# EAGLE board V0.99.3-ESP32-3-fusion (EAGLE 9.6.2)
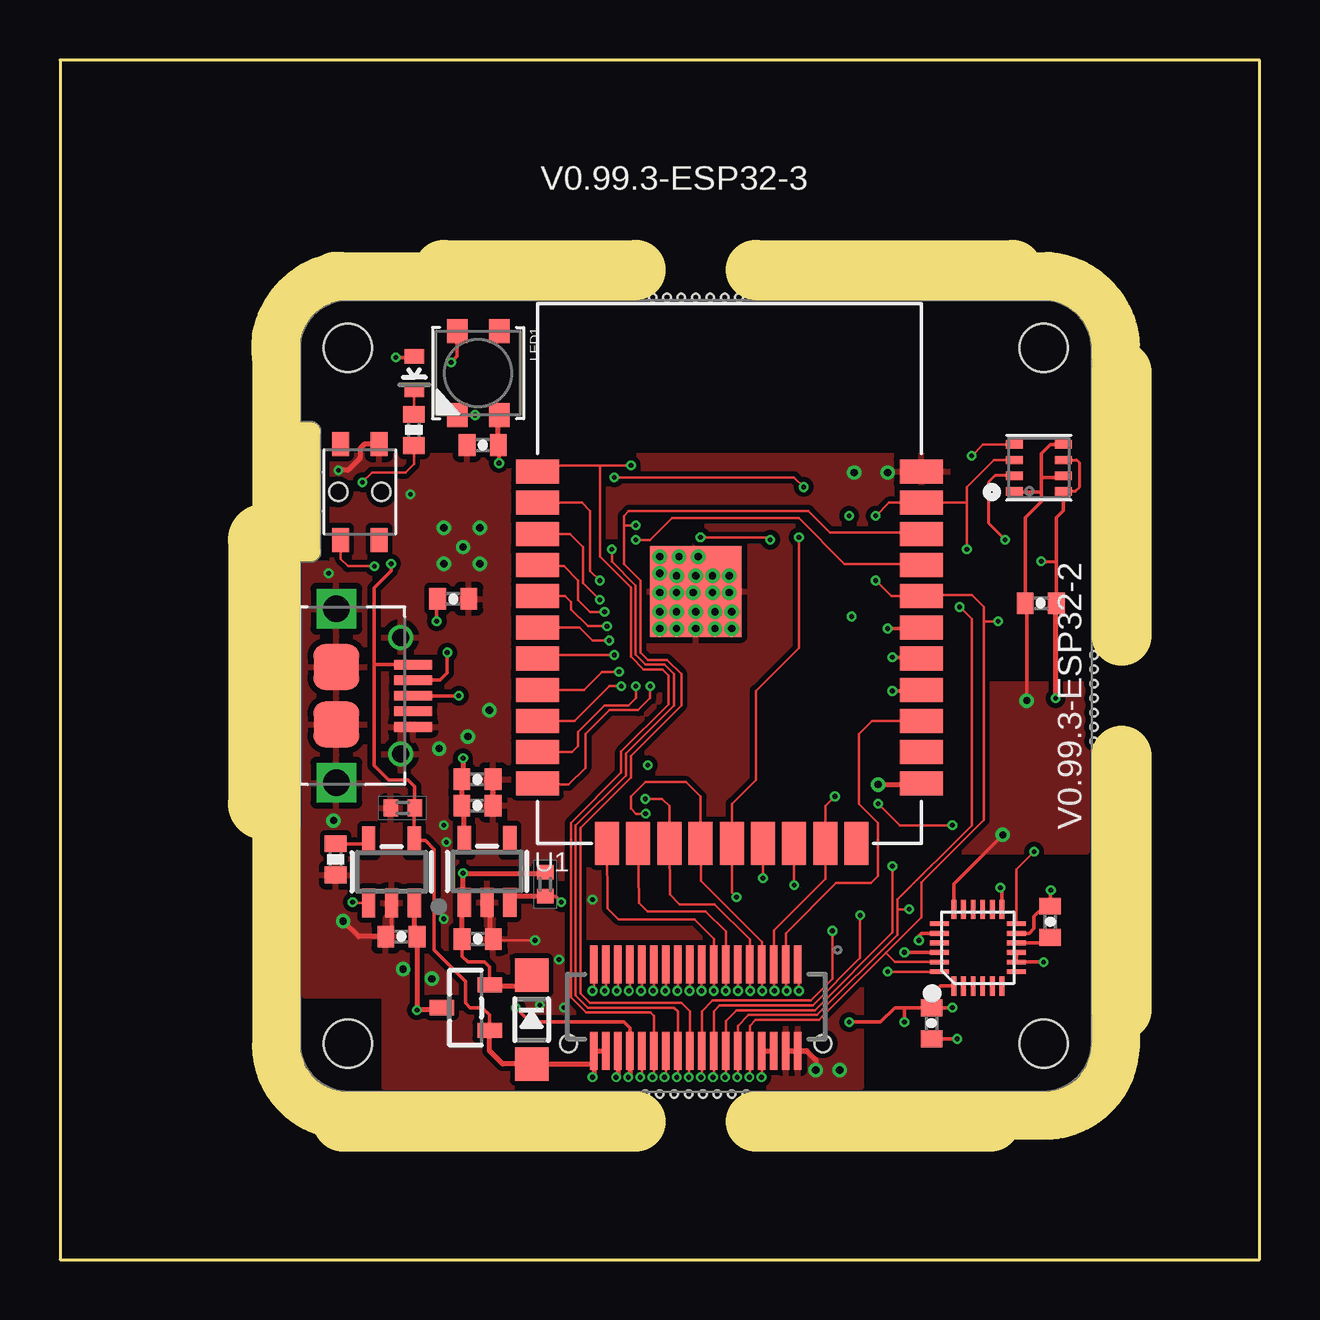
[diagram p0: board, top side]
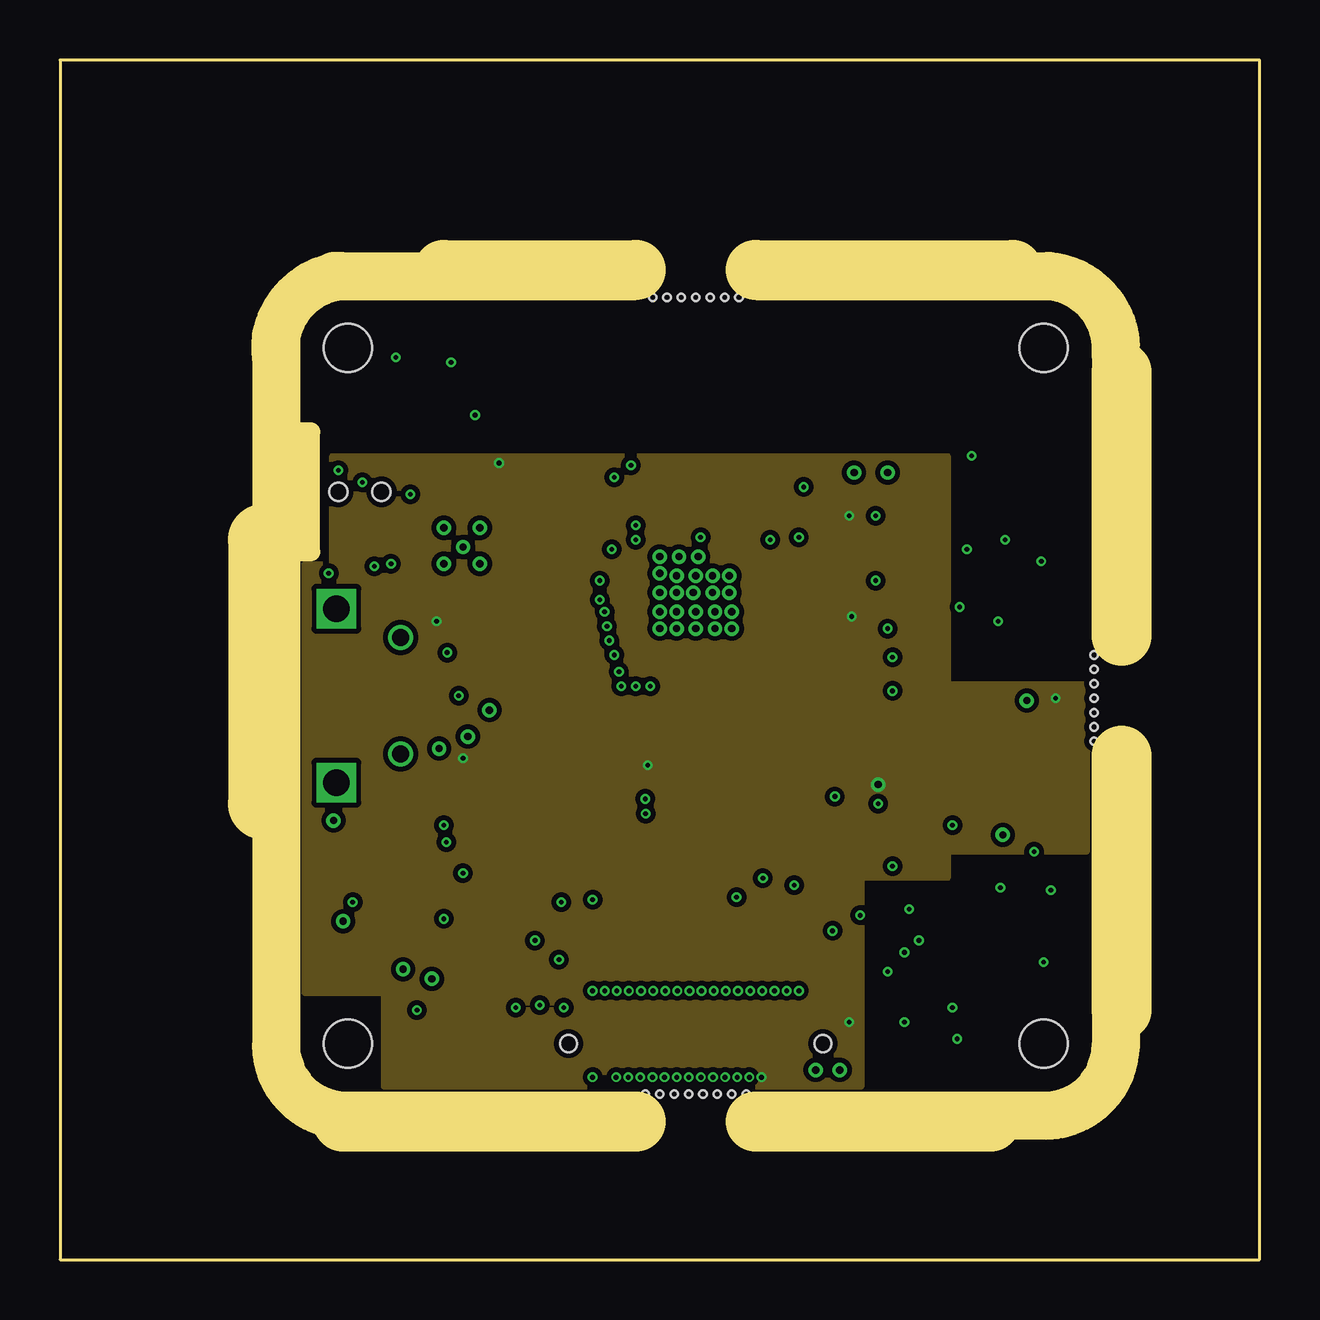
[diagram p1: board, inner layer VCC]
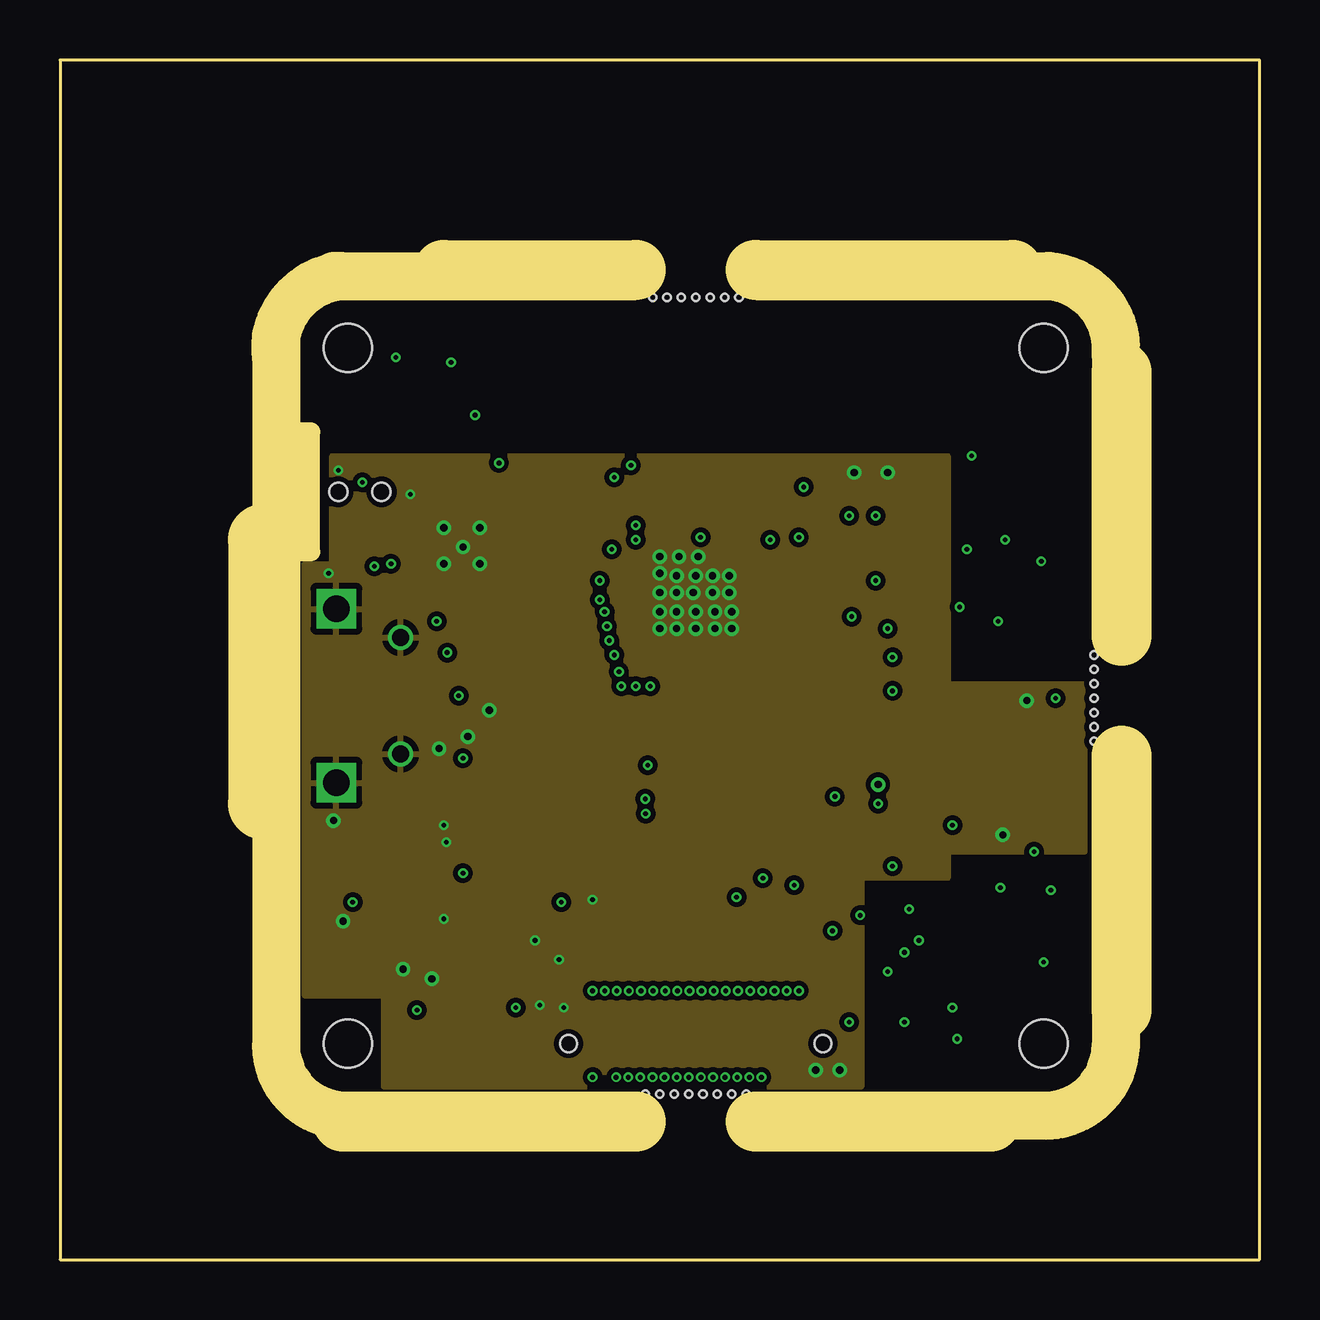
[diagram p2: board, inner layer GND]
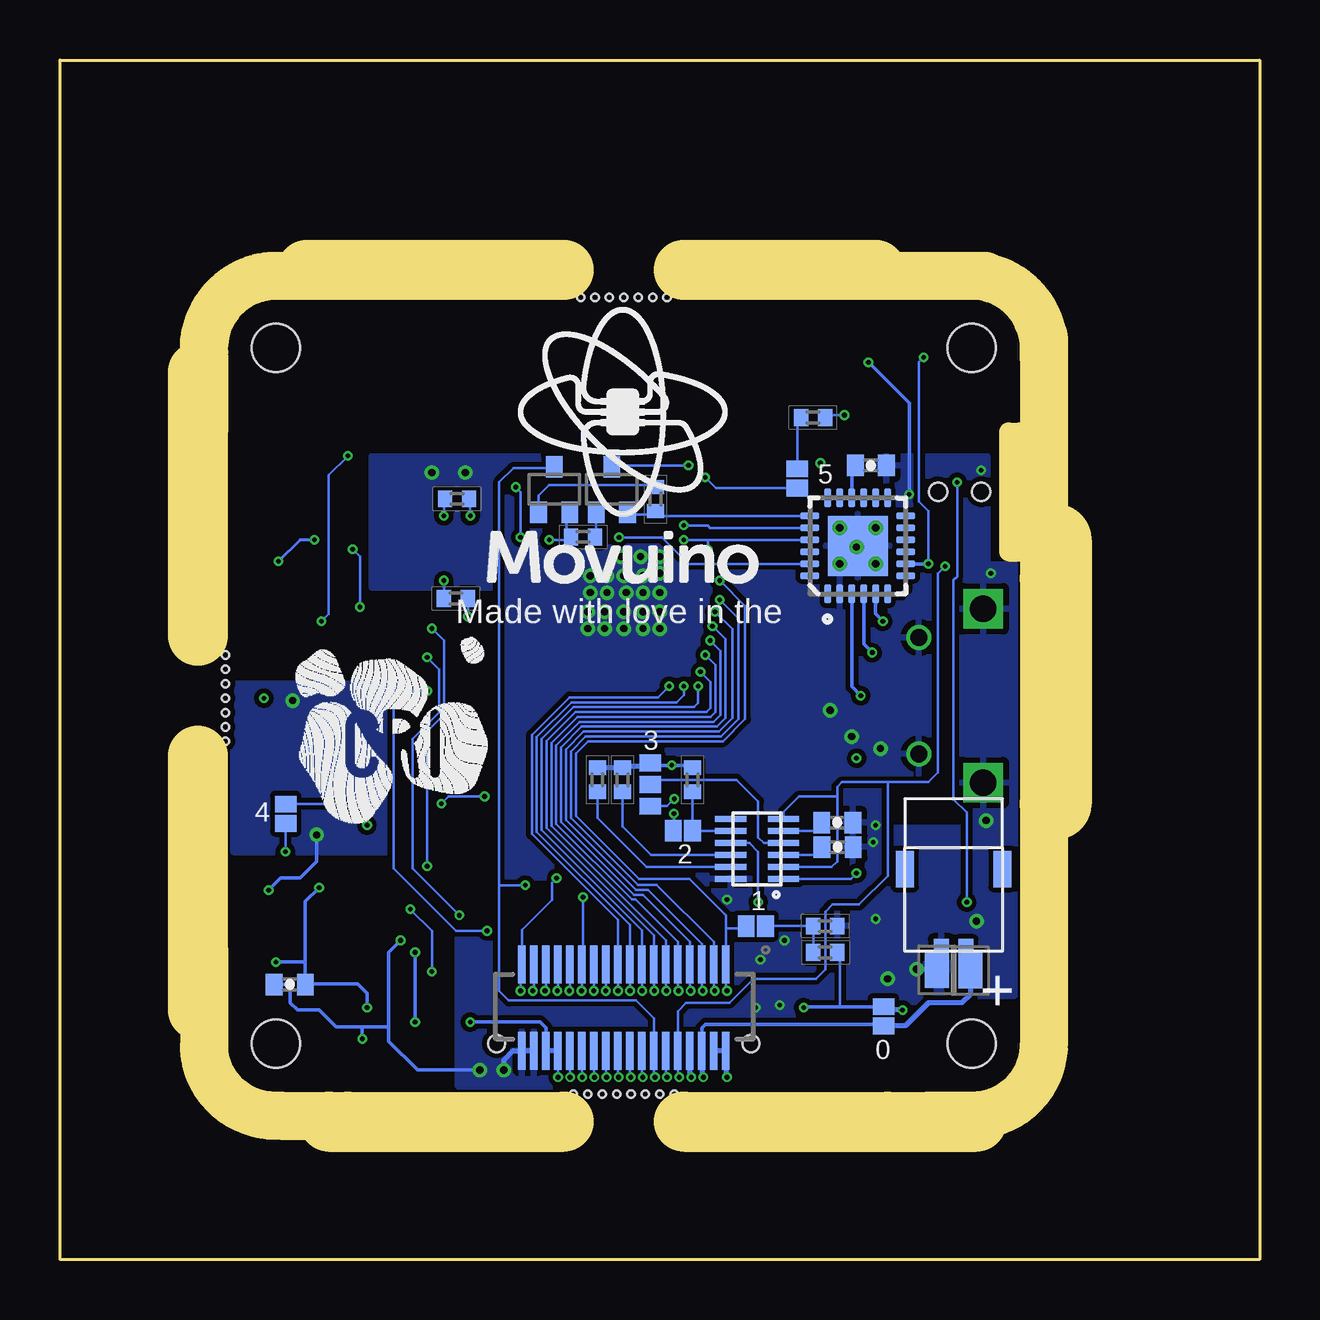
[diagram p3: board, bottom side, seen from below]

Size 50 x 50 mm. Coordinates in mm from the lower left corner, seen from the top.
Outline: 0,50 0,0 50,0 50,50 0,50
Copper layers (1*2*15*16): Top 0.035mm / dielectric 0.2mm / VCC 0.0175mm / dielectric 0.3mm / GND 0.0175mm / dielectric 0.2mm / Bottom 0.035mm
Design rules "PCBWAY_4layer_DRU_no_angle_smallest": minimum track width 4mil, minimum drill 0.2mm, track to track 4mil, track to pad 4mil, pad to pad 4mil, via to via 4mil, smd to smd 0mil, copper to edge 10mil, drill to drill 8mil, minimum pad ring 6mil, minimum via ring 4mil, stop-mask expansion 4mil, vias tented up to drill 25mil, thermal gap 10mil
Net classes: 1 pcbway_smallest: width 0.102 mm, drill 0.2 mm, clearance 0.102 mm
Holes 2 mm at 41,38 12,9 12,38 41,9
Holes 0.3 mm at 28.3,40.1 25.9,40.1 27.1,40.1 27.7,40.1 26.5,40.1 43.1,24.6 43.1,23.4 43.1,25.2 43.1,22.8 43.1,24 26.2,6.9 27.4,6.9 28.6,6.9 28,6.9 26.8,6.9 25.3,40.1 24.7,40.1 43.1,22.2 43.1,21.6 25.6,6.9 25,6.9 24.4,6.9
Milling: 24 lines

## Footprints (pad centres in the part's own frame; a part is rotated, then mirrored left to right if it is on the bottom)
0402-CAP = smd 0.7 x 0.9: 1 -0.65,0; 2 0.65,0
SOD-123 = smd 1.4 x 1.4: A 1.85,0; C -1.85,0
DF12-36-DP-NL = smd 0.3 x 1.6: 1 -4.25,-1.8; 2 -4.25,1.8; 3 -3.75,-1.8; 4 -3.75,1.8; 5 -3.25,-1.8; 6 -3.25,1.8; 7 -2.75,-1.8; 8 -2.75,1.8; 9 -2.25,-1.8; 10 -2.25,1.8; 11 -1.75,-1.8; 12 -1.75,1.8; 13 -1.25,-1.8; 14 -1.25,1.8; 15 -0.75,-1.8; 16 -0.75,1.8; 17 -0.25,-1.8; 18 -0.25,1.8; 19 0.25,-1.8; 20 0.25,1.8; 21 0.75,-1.8; 22 0.75,1.8; 23 1.25,-1.8; 24 1.25,1.8; 25 1.75,-1.8; 26 1.75,1.8; 27 2.25,-1.8; 28 2.25,1.8; 29 2.75,-1.8; 30 2.75,1.8; 31 3.25,-1.8; 32 3.25,1.8; 33 3.75,-1.8; 34 3.75,1.8; 35 4.25,-1.8; 36 4.25,1.8 | hole 0.7: -5.3,1.5; 5.3,1.5
0402-JUMPER3-1-2-CLOSED = smd 0.7 x 0.9: 1 -0.9,0; 2 0,0; 3 0.9,0
LED3535-2 = smd 1 x 0.85: 1 -1.75,0.875; 2 -1.75,-0.875; 3 1.75,-0.875; 4 1.75,0.875
LED-0603-LCSC90692 = smd 0.8 x 0.6: A 0,-0.7; C 0,0.7
PWR2P_1.0 = smd 2.032 x 0.635: + 0.508,0.508; - 0.508,-0.508 | smd 1.524 x 0.762: P$3 -3.429,2.032; P$4 -3.429,-2.032
SOT-323 = smd 0.7 x 0.9: 1 -0.65,-0.95; 2 0.65,-0.95; 3 0,0.95
SOT23-R = smd 0.635 x 1.016: 1 -0.95,-1; 2 0.95,-1; 3 0,1
R0402-SMALL-TDOCU = smd 0.6 x 0.7: 1 -0.5,0; 2 0.5,0
0402-RES = smd 0.7 x 0.9: 1 -0.65,0; 2 0.65,0
LCSC145875-3.5*3 = smd 1 x 0.7: 1 2,0.8; 2 2,-0.8; 3 -2,0.8; 4 -2,-0.8 | hole 0.75: 0,0.9; 0,-0.9
PAD-1X1.5_NOSILK = smd 1 x 1.5: P$1 0,0
SOT23-5 = smd 0.55 x 1.2: 1 -0.95,-1.3; 2 0,-1.3; 3 0.95,-1.3; 4 0.95,1.3; 5 -0.95,1.3
QFN24_4MM_SMSC = smd 0.8 x 0.28: 1 -2,1.25; 2 -2,0.75; 3 -2,0.25; 4 -2,-0.25; 5 -2,-0.75; 6 -2,-1.25; 13 2,-1.25; 14 2,-0.75; 15 2,-0.25; 16 2,0.25; 17 2,0.75; 18 2,1.25 | smd 0.28 x 0.8: 7 -1.25,-2; 8 -0.75,-2; 9 -0.25,-2; 10 0.25,-2; 11 0.75,-2; 12 1.25,-2; 19 1.25,2; 20 0.75,2; 21 0.25,2; 22 -0.25,2; 23 -0.75,2; 24 -1.25,2 | smd 2.5 x 2.5: THERM 0,0
TDFN12 = smd 0.25 x 1.3: 1 -1.25,-1.1; 2 -0.75,-1.1; 3 -0.25,-1.1; 4 0.25,-1.1; 5 0.75,-1.1; 6 1.25,-1.1; 7 1.25,1.1; 8 0.75,1.1; 9 0.25,1.1; 10 -0.25,1.1; 11 -0.75,1.1; 12 -1.25,1.1
WT32 = smd 3.8 x 3.8: 0 -1.4,-0.75 | smd 1.8 x 1: 1 -8,4.25; 2 -8,2.95; 3 -8,1.65; 4 -8,0.35; 5 -8,-0.95; 6 -8,-2.25; 7 -8,-3.55; 8 -8,-4.85; 9 -8,-6.15; 10 -8,-7.45; 11 -8,-8.75; 21 8,-8.75; 22 8,-7.45; 23 8,-6.15; 24 8,-4.85; 25 8,-3.55; 26 8,-2.25; 27 8,-0.95; 28 8,0.35; 29 8,1.65; 30 8,2.95; 31 8,4.25 | smd 1 x 1.8: 12 -5.1,-11.25; 13 -3.8,-11.25; 14 -2.5,-11.25; 15 -1.2,-11.25; 16 0.1,-11.25; 17 1.4,-11.25; 18 2.7,-11.25; 19 4,-11.25; 20 5.3,-11.25
LEAD-QFN24-MPU9250 = smd 0.8 x 0.2: 1 -1.6,1; 2 -1.6,0.6; 3 -1.6,0.2; 4 -1.6,-0.2; 5 -1.6,-0.6; 6 -1.6,-1; 13 1.6,-1; 14 1.6,-0.6; 15 1.6,-0.2; 16 1.6,0.2; 17 1.6,0.6; 18 1.6,1 | smd 0.2 x 0.8: 7 -1,-1.6; 8 -0.6,-1.6; 9 -0.2,-1.6; 10 0.2,-1.6; 11 0.6,-1.6; 12 1,-1.6; 19 1,1.6; 20 0.6,1.6; 21 0.2,1.6; 22 -0.2,1.6; 23 -0.6,1.6; 24 -1,1.6
BME280 = smd 0.7 x 0.35: 1 1.025,0.975; 2 1.025,0.325; 3 1.025,-0.325; 4 1.025,-0.975; 5 -1.025,-0.975; 6 -1.025,-0.325; 7 -1.025,0.325; 8 -1.025,0.975
0402-JUMPER-CLOSED = smd 0.7 x 0.9: 1 -0.4,0; 2 0.4,0
MICRO-USB5+6P-SMD-0.65-AB-TB-LCSC10418 = smd 0.4 x 1.6: 1 -1.3,3.2; 2 -0.65,3.2; 3 0,3.2; 4 0.65,3.2; 5 1.3,3.2 | smd 1.9 x 1.9: P1 -1.2,0; P2 1.2,0 | drill 0.7: P5 -2.425,2.68; P6 2.425,2.68 | drill 1.1 square: P$3 -3.625,0; P$4 3.625,0

## Placement (x,y rotation side)
C1_1-1  DNP  [0402-CAP]  16.2,33.1 0 bottom
C1_2-1  10uF  [0402-CAP]  16.39,27.54 0 top
C2_1-1  10uF  [0402-CAP]  17.41,13.36 0 top
C2_2-1  10uF  [0402-CAP]  17.4,18.92 0 top
C2_3-1  1uF  [0402-CAP]  17.4,20.02 0 top
C3_1-1  470nF  [0402-CAP]  17.6,18.21 0 bottom
C3_2-1  1uF  [0402-CAP]  17.59,17.19 0 bottom
C4_1-1  10uF  [0402-CAP]  14.23,13.46 0 top
C6_1-1  0.1uF  [0402-CAP]  36.33,9.84 270 top
C6_2-1  0.1uF  [0402-CAP]  41.28,14.08 90 top
C6_3-1  0.01uF  [0402-CAP]  40.42,11.47 180 bottom
C7_1-1  0.1uF  [0402-CAP]  40.88,27.36 180 top
C8_1-1  0.1uF  [0402-CAP]  17.62,33.95 180 top
D4-1  MBR120  [SOD-123]  19.66,10 270 top
J1-T-1  DF12-36NOLEGS-FEMALE  [DF12-36-DP-NL]  26.5,10.5 180 top
J4-B-1  DF12-36NOLEGS-MALE  [DF12-36-DP-NL]  26.5,10.5 180 bottom
JP1  JUMPER-31-2-CLOSED  [0402-JUMPER3-1-2-CLOSED]  25.4,19.8 270 bottom
LED1  NEOPIXELSK6812-MINI  [LED3535-2]  17.43,36.95 270 top
LED4-1  Power  [LED-0603-LCSC90692]  14.77,36.95 180 top
PWR1-1  PWR2P_1.0  [PWR2P_1.0]  12.75,12.85 270 bottom
Q1-1  TRANS_NPNMMBT2222AWT  [SOT-323]  29.4,32.1 0 bottom
Q2-1  TRANS_NPNMMBT2222AWT  [SOT-323]  27,32.1 0 bottom
Q5-1  AO3401  [SOT23-R]  16.91,10.5 90 top
R2_1-1  100KR  [R0402-SMALL-TDOCU]  14.29,18.82 0 top
R2_2-1  100KR  [R0402-SMALL-TDOCU]  20.23,15.64 90 top
R3_1-1  10KR  [R0402-SMALL-TDOCU]  26.55,20 90 bottom
R3_2-1  10KR  [R0402-SMALL-TDOCU]  27.6,20 90 bottom
R3_3-1  10KR  [R0402-SMALL-TDOCU]  23.64,20 90 bottom
R4_1-1  120R  [0402-RES]  14.75,34.58 270 top
R4_2-1  4.87KR  [0402-RES]  11.49,16.68 270 top
R5_1-1  100KR  [R0402-SMALL-TDOCU]  18.1,12.8 180 bottom
R5_2-1  100KR  [R0402-SMALL-TDOCU]  18.1,13.9 0 bottom
R5_3-1  10KR  [R0402-SMALL-TDOCU]  25.18,31.7 270 bottom
R5_4-1  10KR  [R0402-SMALL-TDOCU]  28.2,30.12 180 bottom
R5_5-1  10KR  [R0402-SMALL-TDOCU]  33.5,27.55 0 bottom
R5_6-1  10KR  [R0402-SMALL-TDOCU]  33.45,31.71 0 bottom
R8_1-1  470R  [R0402-SMALL-TDOCU]  18.61,35.09 0 bottom
S1-1  [LCSC145875-3.5*3]  12.5,32 270 top
TP1  [PAD-1X1.5_NOSILK]  13.45,12.08 0 bottom
TP2  [PAD-1X1.5_NOSILK]  12.06,12.05 180 bottom
U1  AP2112K-3.3TRG13.3V  [SOT23-5]  17.8,16.18 0 top
U1-1  CP2104  [QFN24_4MM_SMSC]  16.75,29.75 90 bottom
U3-1  STM6601  [TDFN12]  20.94,17.11 90 bottom
U4-1  MCP73831  [SOT23-5]  13.82,16.16 0 top
U5-1  WT32  [WT32]  27.9,28.6 0 top
U6-1  [LEAD-QFN24-MPU9250]  38.26,13 90 top
U7-1  BME280  [BME280]  40.8,33 180 top
U$6  0402-JUMPERCLOSED-DEFAULT  [0402-JUMPER-CLOSED]  21,13.9 0 bottom
U$7  0402-JUMPERCLOSED-DEFAULT  [0402-JUMPER-CLOSED]  15.67,10.14 270 bottom
U$8  LOGO_MOVUINOBOTTOM_11MM  [LOGO_MOVUINO_BMP_11MM-BOTTOM]  26.5,35.31 0 top
U$11  0402-JUMPERCLOSED-DEFAULT  [0402-JUMPER-CLOSED]  24.04,17.87 180 bottom
U$12  0402-JUMPERCLOSED-DEFAULT  [0402-JUMPER-CLOSED]  40.59,18.58 270 bottom
U$13  0402-JUMPERCLOSED-DEFAULT  [0402-JUMPER-CLOSED]  19.27,32.56 270 bottom
U$14  LOGO-CRI-NEW-110MM-BOTTOM-SILK  [LOGO_CRI-NEW-BMP10MM-BOTTOM]  36,21.7 0 top
USB1-1  [MICRO-USB5+6P-SMD-0.65-AB-TB-LCSC10418]  11.52,23.5 270 top

## Library data of the parts
C1_1-1 C1_2-1 C2_1-1 C2_2-1 C4_1-1 = movuino; DIELECTRIC: MLCC, X5R; MF: Kemet; MPN: C0402C106M9PACTU; OC_MOUSER: 80-C0402C106M9P; TOLERANCE: 20%; VOLTAGE: 6.3V
C2_3-1 C3_1-1 C3_2-1 = movuino; DIELECTRIC: MLCC, X5R; MF: Murata Electronics; MPN: GRM155R61A105KE15D; OC_MOUSER: 81-GRM155R61A105KE15; OC_RS: 7235199; TOLERANCE: 10%; VOLTAGE: 10V
C6_1-1 C6_2-1 C7_1-1 C8_1-1 = movuino; DIELECTRIC: MLCC, X5R; MF: Murata Electronics; MPN: GRM155R61C104KA88D; OC_MOUSER: 81-GRM155R61C104KA8D; OC_RS: 7235200; TOLERANCE: 10%; VOLTAGE: 16V
C6_3-1 = movuino; DIELECTRIC: MLCC, X7R; MF: Murata Electronics; MPN: GRM155R71H103KA88D; OC_MOUSER: 81-GRM155R71H103KA8D; OC_RS: 7235278; TOLERANCE: 10%; VOLTAGE: 50V
D4-1 Q5-1 U7-1 = microbuilder
J1-T-1 J4-B-1 JP1 LED1 LED4-1 S1-1 TP1 TP2 U1 U3-1 U5-1 U$6-U$8 U$11-U$13 USB1-1 = movuino
PWR1-1 = movuino; MF: JST; MPN: SM02B-SRSS-TB(LFSN); OC_RS: 5151490
Q1-1 Q2-1 R2_1-1 R2_2-1 R3_1-1 R3_2-1 R3_3-1 R5_1-1 R5_2-1 R5_3-1 R5_4-1 R5_5-1 R5_6-1 R8_1-1 = movuinoV0
R4_1-1 = movuino; MF: TE Connectivity; MPN: CRG0402F100R; OC_MOUSER: 279-CRG0402F100R; OC_RS: 6678602; POWER_RATING: 0.063W; TOLERANCE: 1%
R4_2-1 = movuino; MF: TE Connectivity; MPN: CRG0402F2K0; OC_MOUSER: 279-CRG0402F2K0; OC_RS: 6678738; POWER_RATING: 0.063W; TOLERANCE: 1%
U1-1 = movuino; MF: Silicon Labs; MPN: CP2104-F03-GM; OC_MOUSER: 634-CP2104-F03-GM; OC_RS: 7574983
U4-1 = movuino; MF: Microchip; MPN: MCP73831T-2ACI/OT; OC_MOUSER: 579-MCP73831T-2ACIOT; OC_RS: 7386360
U6-1 = movuino; MF: InvenSense; MPN: MPU-9250; OC_RS: 8837942
U$14 = movuino_aestheticsV0

## Nets
3.3V [pcbway_smallest]: C1_2-1.1 C2_2-1.1 C2_3-1.1 C6_1-1.1 C6_3-1.1 C7_1-1.1 C8_1-1.1 J1-T-1.6 J1-T-1.8 J4-B-1.30 J4-B-1.32 JP1.1 LED1.4 R3_1-1.2 R3_2-1.2 R3_3-1.2 R5_5-1.2 R5_6-1.2 U1-1.5 U1-1.6 U1-1.7 U1.5 U5-1.21 U6-1.1 U6-1.8 U6-1.9 U6-1.13 U6-1.22 U7-1.2 U7-1.6 U7-1.8
5V: D4-1.A J1-T-1.34 J1-T-1.36 J4-B-1.2 J4-B-1.4 LED4-1.A Q5-1.1 R2_1-1.2 U1-1.8 U4-1.4 USB1-1.1
!INT! [pcbway_smallest]: R3_2-1.1 U3-1.11
!PB! [pcbway_smallest]: J1-T-1.28 J4-B-1.10 S1-1.2 U3-1.2 U3-1.6
!PB!_OUT [pcbway_smallest]: R3_3-1.1 U3-1.8 U$11.1
BATT: J1-T-1.32 J4-B-1.6 PWR1-1.+ TP2.P$1 U$7.2
BATT_MONITOR [pcbway_smallest]: R5_1-1.2 R5_2-1.1 U$6.2
CSRD [pcbway_smallest]: C3_1-1.1 U3-1.5
D+ [pcbway_smallest]: U1-1.3 USB1-1.3
D- [pcbway_smallest]: U1-1.4 USB1-1.2
DTR [pcbway_smallest]: Q1-1.2 R5_4-1.2 U1-1.23
EN [pcbway_smallest]: R2_2-1.1 U1.3 U3-1.9
GND [pcbway_smallest]: C1_1-1.2 C1_2-1.2 C2_1-1.2 C2_2-1.2 C2_3-1.2 C3_1-1.2 C3_2-1.2 C4_1-1.1 C6_1-1.2 C6_2-1.2 C6_3-1.2 C7_1-1.2 C8_1-1.2 J1-T-1.2 J1-T-1.4 J4-B-1.34 J4-B-1.36 LED1.2 PWR1-1.- R2_1-1.1 R4_2-1.2 R5_2-1.2 S1-1.3 TP1.P$1 U1-1.2 U1-1.THERM U1.2 U3-1.12 U4-1.2 U5-1.0 U5-1.31 U6-1.11 U6-1.18 U6-1.20 U7-1.1 U7-1.5 U7-1.7 USB1-1.5 USB1-1.P1 USB1-1.P2 USB1-1.P5 USB1-1.P6 USB1-1.P$3 USB1-1.P$4
GPIO0 [pcbway_smallest]: J1-T-1.24 J4-B-1.14 Q1-1.3 U5-1.18
GPIO2 [pcbway_smallest]: J1-T-1.1 J4-B-1.35 U5-1.17
INT_MPU [pcbway_smallest]: U6-1.12 U$12.2
IO4 [pcbway_smallest]: J1-T-1.5 J4-B-1.31 U5-1.19 U$12.1
IO5: J1-T-1.3 J4-B-1.33 U5-1.23
IO12 [pcbway_smallest]: J1-T-1.9 J4-B-1.27 JP1.3 U5-1.14
IO13 [pcbway_smallest]: J1-T-1.7 J4-B-1.29 U5-1.15 U$11.2
IO14 [pcbway_smallest]: J1-T-1.13 J4-B-1.23 U5-1.13
IO15 [pcbway_smallest]: J1-T-1.11 J4-B-1.25 U5-1.16 U$13.2
IO16: U5-1.20
IO17: U5-1.22
IO25 [pcbway_smallest]: J1-T-1.19 J4-B-1.17 U5-1.10
IO26 [pcbway_smallest]: J1-T-1.17 J4-B-1.19 U5-1.11
IO27 [pcbway_smallest]: J1-T-1.15 J4-B-1.21 U5-1.12
IO32 [pcbway_smallest]: J1-T-1.23 J4-B-1.13 U5-1.8
IO33 [pcbway_smallest]: J1-T-1.21 J4-B-1.15 U5-1.9
IO34 [pcbway_smallest]: J1-T-1.29 J4-B-1.7 U5-1.5
IO35 [pcbway_smallest]: J1-T-1.25 J4-B-1.11 U5-1.7
IO36 [pcbway_smallest]: J1-T-1.35 J4-B-1.1 U5-1.2 U$6.1
IO37 [pcbway_smallest]: J1-T-1.27 J4-B-1.9 U5-1.6
IO38 [pcbway_smallest]: J1-T-1.33 J4-B-1.3 U5-1.3
IO39 [pcbway_smallest]: J1-T-1.31 J4-B-1.5 U5-1.4
MISO [pcbway_smallest]: J1-T-1.14 J4-B-1.24 U5-1.26
MOSI [pcbway_smallest]: J1-T-1.16 J4-B-1.22 U5-1.25
N$2 [pcbway_smallest]: R4_1-1.2 U4-1.1
N$3: LED4-1.C R4_1-1.1
N$4 [pcbway_smallest]: Q1-1.1 R5_3-1.1
N$6 [pcbway_smallest]: R4_2-1.1 U4-1.5
N$7 [pcbway_smallest]: R3_1-1.1 U3-1.10
N$8 [pcbway_smallest]: Q2-1.1 R5_4-1.1
N$18: LED1.3 R8_1-1.2
N$28 [pcbway_smallest]: C6_2-1.1 U6-1.10
NEOPIXEL_IN [pcbway_smallest]: R8_1-1.1 U$13.1
PS_HOLD [pcbway_smallest]: JP1.2 U3-1.4
RESET [pcbway_smallest]: J1-T-1.26 J4-B-1.12 Q2-1.3 U5-1.1
RTS [pcbway_smallest]: Q2-1.2 R5_3-1.2 U1-1.19
RXD [pcbway_smallest]: J1-T-1.22 J4-B-1.16 U1-1.21 U5-1.28
SCK [pcbway_smallest]: J1-T-1.18 J4-B-1.20 U5-1.24
SCL [pcbway_smallest]: J1-T-1.10 J4-B-1.28 R5_5-1.1 U5-1.27 U6-1.23 U7-1.4
SDA [pcbway_smallest]: J1-T-1.12 J4-B-1.26 R5_6-1.1 U5-1.30 U6-1.24 U7-1.3
TXD [pcbway_smallest]: J1-T-1.20 J4-B-1.18 U1-1.20 U5-1.29
VBATT [pcbway_smallest]: C4_1-1.2 J1-T-1.30 J4-B-1.8 Q5-1.3 R5_1-1.1 U4-1.3 U$7.1
VIN [pcbway_smallest]: C2_1-1.1 D4-1.C Q5-1.2 R2_2-1.2 U1.1 U3-1.1
VPP: C1_1-1.1 U1-1.16
VREF: C3_2-1.1 U3-1.3

## Tracks (layer width: path | path; a pad name or v marks a point on that pad's centre or on a via)
3.3V  (via drill 0.2 pad 0.4, 0.3 pad 0.6)
  Top 0.102: J1-T-1.8 29.25,7.61 v29.24,7.6
  Top 0.127: U7-1.6 42.38,33.33 42.5,33.2 42.5,32.2 42.33,32.02 U7-1.8 | U7-1.2 38.98,32.67 38.7,32.4 38.7,30.7 v39.4,30 | v40.9,29.1 41.53,29.1
  Top 0.152: v15.7,26.6 15.7,27.32 C1_2-1.1 | 36.3,10.49 C6_1-1.1 v37.19,10.49 v37.2,10.5 | 36.3,10.49 35.2,10.49 | 35.2,10.49 34.79,10.49 34.2,9.9 v32.9,9.9 | U6-1.1 36.7,11.4 36.3,11 36.3,10.49 | v41,12.4 U6-1.8 U6-1.9 | U6-1.13 39.26,15.44 v39.2,15.5 | 16.8,20.07 C2_3-1.1 | U6-1.22 v35.2,12.8 | v35.2,9.9 35.2,10.49 | C8_1-1.1 arc-90 18.3,33.92 v18.3,33.2 | C7_1-1.1 41.53,29.1 41.53,30.93 41.83,31.23 U7-1.8
  Top 0.2: J1-T-1.8 J1-T-1.6 | v41.5,23.4 41.5,27.32 C7_1-1.1 | v34.1,19.8 35.85,19.8 U5-1.21 | C2_3-1.1 C2_2-1.1 16.85,18.82 U1.5 | v16.8,20.9 16.8,20.07 | C8_1-1.1 18.27,35.16 LED1.4
  Bottom 0.102: J1-T-1.8 29.25,7.61 v29.24,7.6 | v32.9,31 32.9,31.66 R5_6-1.2 | R5_5-1.2 v33,26.8
  Bottom 0.127: v39.4,30 40,30 v40.9,29.1
  Bottom 0.152: v15.7,26.6 16.02,26.92 U1-1.5 U1-1.6 14.95,27.75 14.75,27.95 U1-1.7 | v37.2,10.5 37.2,11.1 37.6,11.5 39.74,11.5 C6_3-1.1 39.77,12.4 | 39.77,12.4 39.77,14.93 v39.2,15.5 | J1-T-1.6 29.75,9.65 30,9.9 v32.9,9.9 | 26.61,20.56 R3_1-1.2 | JP1.1 25.36,20.6 v24.5,20.6 23.7,20.6 R3_3-1.2 | v35.2,12.8 v35.2,9.9 | v41,12.4 39.77,12.4
  Bottom 0.2: J1-T-1.8 J1-T-1.6 | JP1.1 25.54,20.56 26.61,20.56 | R3_1-1.2 R3_2-1.2
  pour VCC (isolate 0.203): 10.2,29 37,29 37,15.9 10.2,15.9
  pour VCC (isolate 0.203): 13.5,17 33.4,17 33.4,7.2 13.5,7.2
  pour VCC (isolate 0.203): 32.8,24 42.8,24 42.8,17 32.8,17
  pour VCC (isolate 0.203): 11.35,33.5 37,33.5 37,28 11.35,28
  pour VCC (isolate 0.203): 10.2,18.1 19.4,18.1 19.4,11.1 10.2,11.1
5V  (via drill 0.2 pad 0.4)
  Top 0.152: 13.1,24.8 13.1,20.6 13.7,20 14.5,20 14.79,19.71 R2_1-1.2 14.77,18.8 U4-1.4 15.24,17.46 15.6,17.1 15.6,12.9 16.9,11.6 16.9,10.7 17.1,10.5 17.6,10.5 17.91,10.19 Q5-1.1 | 13.1,24.8 13.1,28 13.8,28.7 v13.8,29 | USB1-1.1 13.1,24.8 | v14,37.6 14.72,37.6 LED4-1.A
  Top 0.2: J1-T-1.34 J1-T-1.36 22.25,8.1 | 22.25,8.1 22.25,7.65 v22.2,7.6 | 22.25,8.1 22.2,8.15 D4-1.A 18.45,8.15 17.9,8.7 Q5-1.1
  Bottom 0.102: v14,37.6 14.2,37.4 14.2,31.6 13.8,31.2 v13.8,29
  Bottom 0.152: v13.8,29 U1-1.8
  Bottom 0.2: v22.2,7.6 22.25,7.65 J1-T-1.36 J1-T-1.34
!INT!
  Bottom 0.102: U3-1.11 25.56,16.36 27.6,18.4 R3_2-1.1
!PB!  (via drill 0.2 pad 0.4)
  Top 0.102: J1-T-1.28 24.25,7.66 v24.19,7.6 | v13.1,28.9 12,28.9 11.7,29.2 S1-1.2
  Bottom 0.102: 17.6,19.3 17.6,16.6 17.84,16.36 U3-1.2 | 17.6,19.3 17.6,19.7 17.4,19.9 15.5,19.9 | 15.5,19.9 13.8,19.9 13.4,20.3 13.4,28.6 v13.1,28.9 | 17.6,19.3 19.2,19.3 19.84,18.66 U3-1.6 | v24.19,7.6 24.25,7.66 J1-T-1.28 24.25,10.35 23.9,10.7 22.1,10.7 21.1,11.7 18.5,11.7 18.1,12.1 18.1,14.5 17.8,14.8 16.7,14.8 15.5,16 15.5,19.9
!PB!_OUT
  Bottom 0.102: U3-1.8 U$11.1 R3_3-1.1
BATT  (via drill 0.2 pad 0.4)
  Top 0.2: J1-T-1.32 23.25,7.67 v23.18,7.6
  Bottom 0.152: 15.7,9.74 U$7.2 | J1-T-1.32 23.25,9.65 23.1,9.8 15.46,9.8 15.4,9.74 | PWR1-1.+ 12.24,12.23 TP2.P$1
  Bottom 0.2: J1-T-1.32 23.25,7.67 v23.18,7.6 | TP2.P$1 12.06,11.04 12.4,10.7 13.8,10.7 14.76,9.74 15.4,9.74 15.7,9.74
BATT_MONITOR
  Bottom 0.102: U$6.2 18.85,13.9 R5_2-1.1 R5_1-1.2
CSRD
  Bottom 0.102: U3-1.5 18.6,17.86 arc-90 C3_1-1.1
D+  (via drill 0.2 pad 0.4)
  Top 0.152: USB1-1.3 v16.62,23.5
  Bottom 0.152: U1-1.3 17,23.88 v16.62,23.5
D-  (via drill 0.2 pad 0.4)
  Top 0.152: USB1-1.2 15.85,24.15 16.14,24.44 v16.14,25.3
  Bottom 0.152: U1-1.4 16.5,25.66 v16.14,25.3
DTR  (via drill 0.2 pad 0.4)
  Top 0.102: v26.7,30.1 29.5,30.1 v29.6,30
  Bottom 0.102: U1-1.23 23.8,29 24.9,30.1 v26.7,30.1 | Q1-1.2 28.89,31.01 28.89,30.16 R5_4-1.2 28.97,30 v29.6,30
EN  (via drill 0.2 pad 0.4)
  Top 0.152: v20.9,14.9 20.66,15.14 R2_2-1.1
  Top 0.2: R2_2-1.1 18.75,15.14 U1.3
  Bottom 0.102: U3-1.9 21.26,17.36 20.9,17 v20.9,14.9
GND  (via drill 0.2 pad 0.4, 0.3 pad 0.6)
  Top 0.102: v19.8,13.3 18.12,13.3 C2_1-1.2
  Top 0.152: LED1.2 16.55,37.66 v16.3,37.4 | U6-1.18 37.26,15.66 v39.3,17.7 | C6_1-1.2 v37.39,9.19 v37.4,9.2 | v35.8,13.3 35.8,13.5 35.9,13.6 U6-1.20 | v41.3,15.4 41.27,15.38 C6_2-1.2 41.02,14.72 40.6,14.3 40.6,13.8 40.4,13.6 U6-1.11 | U4-1.2 13.82,13.7 C4_1-1.1 | v40.3,23.3 40.3,27.29 C7_1-1.2 40.23,30.93 40.9,31.6 40.9,32 | 17.91,13.51 C2_1-1.2 | U7-1.5 41.27,33.98 40.9,33.6 40.9,32.6 | 40.9,32 40.9,32.6 | U7-1.7 41.75,32.6 40.9,32.6 | U7-1.1 39.8,32 40.9,32
  Top 0.2: J1-T-1.4 J1-T-1.2 31.1,8.7 31.5,8.3 v31.5,7.9 | C4_1-1.1 12.44,13.46 v11.8,14.1 | S1-1.3 12.7,34 12.5,33.8 12.5,33.4 12,32.9 v11.6,32.9 | C2_2-1.2 C2_3-1.2 | U1.2 17.91,14.77 17.91,13.51
  Bottom 0.102: U1-1.THERM v17.5,29
  Bottom 0.152: v16.3,37.4 14.6,35.7 v14.6,31.9 | 36.3,9.7 37.4,9.7 | 36.3,9.7 36.3,12.8 v35.8,13.3 | v39.3,17.7 39.3,16.6 40,15.9 40.8,15.9 v41.3,15.4 | C6_3-1.2 40.56,11.46 40.4,11.3 40.4,10.7 40.1,10.4 39.2,10.4 38.5,9.7 37.4,9.7 | v37.4,9.2 37.4,9.7 | v32.5,7.9 35.1,7.9 36.3,9.1 36.3,9.7 | PWR1-1.- 13.45,12.15 TP1.P$1
  Bottom 0.2: J1-T-1.4 J1-T-1.2 31.1,8.7 31.5,8.3 v31.5,7.9 | PWR1-1.- 13.5,12.1 v14.3,12.1
  other vias: 25,29.3 25.8,29.3 26.6,29.3 25,28.6 25,27.8 25,27 25,26.3 25.7,26.3 26.5,26.3 27.3,26.3 28,26.3 28,27 27.3,27 26.5,27 25.7,27 25.7,27.8 26.4,27.8 27.2,27.8 27.9,27.8 27.9,28.5 27.2,28.5 26.5,28.5 25.7,28.5 15.8,21.3 17,21.8 17.9,22.9 11.4,18.3 15.5,11.7 34.5,32.8 33.1,32.8 11.2,28.6 16,14.2 16.1,17.4 16,18.1 20,10.6 21,10.5 20.8,12.5 22.2,15 16,30.5 16,29 17.5,30.5 16.8,29.7
  pour Top (isolate 0.203): 37,29 10.2,29 10.2,15.9 37,15.9
  pour Bottom (isolate 0.203): 37,29 10.2,29 10.2,15.9 37,15.9
  pour GND (isolate 0.203): 10.2,29 37,29 37,15.9 10.2,15.9
  pour Bottom (isolate 0.203): 33.4,17 13.5,17 13.5,7.2 33.4,7.2
  pour Top (isolate 0.203): 33.4,17 13.5,17 13.5,7.2 33.4,7.2
  pour GND (isolate 0.203): 13.5,17 33.4,17 33.4,7.2 13.5,7.2
  pour Top (isolate 0.203): 32.8,24 42.8,24 42.8,17 32.8,17
  pour Bottom (isolate 0.203): 32.8,24 42.8,24 42.8,17 32.8,17
  pour GND (isolate 0.203): 32.7,24 42.7,24 42.7,17 32.7,17
  pour Top (isolate 0.203): 37,33.5 11.35,33.5 11.35,28 37,28
  pour GND (isolate 0.203): 11.35,33.5 37,33.5 37,28 11.35,28
  pour Bottom (isolate 0.203): 37,33.5 11.35,33.5 11.35,28 37,28
  pour GND (isolate 0.203): 10.2,17.6 18.3,17.6 18.3,11 10.2,11
  pour Top (isolate 0.203): 10.2,18 18.5,18 18.5,11 10.2,11
  pour Bottom (isolate 0.203): 10.2,18 18.5,18 18.5,11 10.2,11
GPIO0  (via drill 0.2 pad 0.4)
  Top 0.102: v30.6,15.6 30.6,16.83 U5-1.18 | J1-T-1.24 25.25,7.65 v25.2,7.6
  Bottom 0.102: v25.2,7.6 25.25,7.65 J1-T-1.24 25.25,10.05 26,10.8 31.3,10.8 31.7,11.2 31.7,14.5 31.7,15.6 | 31.7,15.6 31.7,15.7 31.7,32.4 31.1,33 29.45,33 Q1-1.3 | v30.6,15.6 31.7,15.6
GPIO2  (via drill 0.2 pad 0.4)
  Top 0.102: J4-B-1.35 arc-90 30.8,12.25 v30.8,11.2 | v29.3,15.9 U5-1.17
  Bottom 0.102: v30.8,11.2 30.8,12.25 arc90 J4-B-1.35 30.75,13.75 29.5,15 29.5,15.7 v29.3,15.9
INT_MPU  (via drill 0.2 pad 0.4)
  Top 0.102: U6-1.12 39.86,16.26 v40.6,17
  Bottom 0.102: v40.6,17 U$12.2
IO4  (via drill 0.2 pad 0.4)
  Top 0.102: v32.3,19.3 31.9,18.9 U5-1.19 31.9,15.86 29.75,13.71 J4-B-1.31 29.75,11.23 v29.78,11.2 | v34.1,19 35,18.1 v37.2,18.1
  Bottom 0.102: v32.3,19.3 33.8,19.3 v34.1,19 | v37.2,18.1 38.1,19 40.57,19 U$12.1 | J4-B-1.31 29.75,11.23 v29.78,11.2
IO5  (via drill 0.2 pad 0.4)
  Top 0.102: U5-1.23 33.85,22.45 33.3,21.9 33.3,19 34.1,18.2 34.1,16 33.8,15.7 32.35,15.7 30.25,13.6 J4-B-1.33 30.25,11.24 v30.29,11.2
  Bottom 0.102: J4-B-1.33 30.25,11.24 v30.29,11.2
IO12  (via drill 0.2 pad 0.4)
  Top 0.102: v24.4,19.2 25.1,19.2 JP1.3 U5-1.14 25.43,15.21 25.83,14.81 27.29,14.81 28.75,13.35 J4-B-1.27 28.75,11.22 v28.77,11.2
  Bottom 0.102: J4-B-1.27 28.75,11.22 v28.77,11.2 | JP1.3 24.7,18.9 v24.4,19.2
IO13  (via drill 0.2 pad 0.4)
  Top 0.102: v24.41,18.58 24.02,18.58 23.8,18.8 23.8,19.3 24.4,19.9 26.1,19.9 26.7,19.3 U5-1.15 26.71,16.5 26.71,15.79 29.25,13.25 J4-B-1.29 29.25,11.22 v29.27,11.2
  Bottom 0.102: 24.41,17.9 U$11.2 24.41,17.9 | J4-B-1.29 29.25,11.22 v29.27,11.2 | 24.41,17.9 v24.41,18.58
IO14  (via drill 0.2 pad 0.4)
  Top 0.102: U5-1.13 24.13,14.87 24.48,14.52 26.9,14.52 27.75,13.67 J1-T-1.13 v27.75,11.2
  Bottom 0.102: J1-T-1.13 v27.75,11.2
IO15  (via drill 0.2 pad 0.4)
  Top 0.102: v30.8,30.1 30.8,25.5 29,23.7 29,20 28,19 U5-1.16 28,15.3 v28.2,15.1 | v23.1,32.6 23.51,32.6 23.52,32.6 30.6,32.6 v31,32.2 | v28.26,11.2 v28.25,11.21 J4-B-1.25
  Bottom 0.102: v30.8,30.1 30.8,32 v31,32.2 | U$13.2 22.66,32.16 v23.1,32.6 | v28.26,11.2 v28.25,11.21 J4-B-1.25 28.2,12.3 v28.2,15.1
IO25  (via drill 0.2 pad 0.4)
  Top 0.102: v24,23.9 24,23.4 23.7,23.1 22.7,23.1 21.6,22 21.6,21.4 21.35,21.15 U5-1.10 | J1-T-1.19 26.25,11.21 v26.24,11.2
  Bottom 0.102: v24,23.9 24,23.53 24.3,23.23 28.67,23.23 30.13,21.77 30.13,17.81 26.25,13.94 J1-T-1.19 26.25,11.21 v26.24,11.2
IO26  (via drill 0.2 pad 0.4)
  Top 0.102: v24.6,23.9 24.6,23.4 24.1,22.9 22.9,22.9 21.9,21.9 21.9,20.5 21.2,19.8 19.95,19.8 U5-1.11 | v26.74,11.2 26.74,11.76 26.7,11.8 26.7,12.25 J1-T-1.17
  Bottom 0.102: v24.6,23.9 25.07,23.43 28.76,23.43 30.33,21.86 30.33,17.73 26.75,14.15 J1-T-1.17 v26.75,11.21 v26.74,11.2
IO27  (via drill 0.2 pad 0.4)
  Top 0.102: U5-1.12 22.83,14.64 23.29,14.18 26.45,14.18 27.26,13.37 27.25,13.36 J1-T-1.15 v27.25,11.2
  Bottom 0.102: v27.25,11.2 J1-T-1.15
IO32  (via drill 0.2 pad 0.4)
  Top 0.102: J1-T-1.23 25.25,11.22 v25.23,11.2 | U5-1.8 21.85,23.75 22.6,24.5 v23.3,24.5
  Bottom 0.102: v23.3,24.5 22.88,24.08 22.88,23 23.06,22.82 28.5,22.82 29.72,21.61 29.72,17.98 25.25,13.51 J1-T-1.23 25.25,11.22 v25.23,11.2
IO33  (via drill 0.2 pad 0.4)
  Top 0.102: v23.4,23.9 22.9,23.9 21.45,22.45 U5-1.9 | J1-T-1.21 25.75,11.22 v25.73,11.2
  Bottom 0.102: v23.4,23.9 23.4,23.2 23.58,23.02 28.59,23.02 29.92,21.69 29.92,17.9 25.75,13.73 J1-T-1.21 25.75,11.22 v25.73,11.2
IO34  (via drill 0.2 pad 0.4)
  Top 0.102: J1-T-1.29 23.75,11.24 v23.71,11.2 | v22.8,26.4 22,26.4 21.3,27.1 21.3,27.4 21.05,27.65 U5-1.5
  Bottom 0.102: v22.8,26.4 22.27,25.87 22.27,22.57 22.62,22.21 28.25,22.21 29.11,21.35 29.11,18.23 26.08,15.2 25.7,15.2 23.75,13.25 J1-T-1.29 23.75,11.24 v23.71,11.2
IO35  (via drill 0.2 pad 0.4)
  Top 0.102: J1-T-1.25 24.75,11.23 v24.72,11.2 | v23.1,25.2 20.05,25.2 U5-1.7
  Bottom 0.102: v23.1,25.2 22.67,24.77 22.67,22.83 22.88,22.62 28.42,22.62 29.52,21.52 29.52,18.07 24.75,13.3 J1-T-1.25 24.75,11.23 v24.72,11.2
IO36  (via drill 0.2 pad 0.4)
  Top 0.102: J1-T-1.35 22.25,11.25 v22.2,11.2 | U5-1.2 21.75,31.55 22.1,31.2 22.1,28.7 v22.5,28.3
  Bottom 0.102: v22.2,11.2 22.25,11.25 J1-T-1.35 22.25,13.8 | 22.25,13.8 22.25,14.35 22.3,14.4 23.77,15.87 25.87,15.87 28.5,18.5 28.5,21.1 28,21.6 22.37,21.6 21.44,22.53 21.44,27.1 21.44,27.24 v22.5,28.3 | 22.25,13.8 21.5,13.8 U$6.1
IO37  (via drill 0.2 pad 0.4)
  Top 0.102: J1-T-1.27 24.25,11.23 v24.22,11.2 | v22.9,25.8 22.2,25.8 21.65,26.35 U5-1.6
  Bottom 0.102: v22.9,25.8 22.47,25.37 22.47,22.7 22.76,22.41 28.34,22.41 29.31,21.44 29.31,18.15 26.16,15 26.01,15 24.25,13.24 J1-T-1.27 24.25,11.23 v24.22,11.2
IO38  (via drill 0.2 pad 0.4)
  Top 0.102: J1-T-1.33 22.75,11.25 v22.7,11.2 | U5-1.3 21.25,30.25 21.8,29.7 21.8,28.2 v22.5,27.5
  Bottom 0.102: v22.7,11.2 22.75,11.25 J1-T-1.33 22.75,13.23 25.13,15.61 25.91,15.61 28.7,18.4 28.7,21.18 28.08,21.8 22.45,21.8 21.73,22.53 21.73,26.73 v22.5,27.5
IO39  (via drill 0.2 pad 0.4)
  Top 0.102: J1-T-1.31 23.25,11.24 v23.21,11.2 | U5-1.4 19.95,28.9 21,28.9 21.6,28.3 21.6,27.5 22.1,27 v22.7,27
  Bottom 0.102: v22.7,27 21.97,26.27 21.97,22.57 22.54,22.01 28.17,22.01 28.91,21.27 28.91,18.32 25.99,15.41 25.5,15.41 23.25,13.16 J1-T-1.31 23.25,11.24 v23.21,11.2
MISO  (via drill 0.2 pad 0.4)
  Top 0.102: v34.7,16.4 34.7,13.62 31.47,10.39 28.19,10.39 27.75,9.95 J1-T-1.14 27.75,7.63 v27.72,7.6
  Top 0.152: U5-1.26 35.85,26.3 v34.5,26.3
  Bottom 0.102: v34.7,16.4 34.7,22.01 34,22.72 34,25.8 v34.5,26.3 | J1-T-1.14 27.75,7.63 v27.72,7.6
MOSI  (via drill 0.2 pad 0.4)
  Top 0.102: v33.35,14.35 33.35,12.56 31.38,10.6 27.5,10.6 27.25,10.35 J1-T-1.16 27.25,7.63 v27.22,7.6
  Top 0.152: U5-1.25 35.85,25.1 v34.7,25.1
  Bottom 0.102: v33.35,14.35 35.3,16.3 35.3,21.7 34.2,22.8 34.2,24.6 v34.7,25.1 | J1-T-1.16 27.25,7.63 v27.22,7.6
N$2  (via drill 0.2 pad 0.4)
  Top 0.102: U4-1.1 12.24,14.86 v12.2,14.9 | v12.6,32.4 13,32.8 14.4,32.8 14.75,33.15 R4_1-1.2
  Bottom 0.102: v12.2,14.9 12.2,18.63 12.75,19.19 12.75,28.31 12.6,28.46 v12.6,32.4
N$3
  Top 0.102: LED4-1.C 14.75,36.18 R4_1-1.1
N$4
  Bottom 0.102: Q1-1.1 30.05,31.85 29.61,32.28 25.24,32.28 R5_3-1.1
N$6
  Top 0.152: U4-1.5 12.74,17.33 R4_2-1.1
N$7
  Bottom 0.102: R3_1-1.1 26.55,18.05 25.36,16.86 U3-1.10
N$8
  Bottom 0.102: Q2-1.1 27.65,30.22 R5_4-1.1
N$18  (via drill 0.2 pad 0.4)
  Top 0.152: v17.3,35.2 LED1.3
  Bottom 0.102: R8_1-1.2 arc90 18,35.2 v17.3,35.2
N$28
  Top 0.152: U6-1.10 41.05,13.2 C6_2-1.1
NEOPIXEL_IN
  Bottom 0.102: U$13.1 19.27,34.93 R8_1-1.1
PS_HOLD
  Bottom 0.102: U3-1.4 20.66,17.36 20.9,17.6 20.9,19.1 21.8,20 25.06,20 25.16,19.9 JP1.2
RESET  (via drill 0.2 pad 0.4)
  Top 0.102: 21.29,10.93 21.29,11 | 21.29,11 21.29,18.19 23.39,20.29 23.39,21.17 25.36,23.14 25.36,24.35 25.12,24.59 24.33,24.59 23.79,25.13 23.79,28.01 22.5,29.3 22.5,33.1 | 21.29,10.93 21.93,10.29 24.61,10.29 24.75,10.15 J1-T-1.26 24.75,7.66 v24.7,7.6 | 21.29,10.93 21.29,11 | v23.8,33.1 22.5,33.1 | 22.5,33.1 20.15,33.1 U5-1.1
  Bottom 0.102: v24.7,7.6 24.75,7.66 J1-T-1.26 | v23.8,33.1 26.95,33.1 Q2-1.3
RTS
  Bottom 0.102: Q2-1.2 26.18,31.05 25.46,31.05 25.32,31.19 R5_3-1.2 25.13,31 U1-1.19
RXD  (via drill 0.2 pad 0.4)
  Top 0.102: v25.7,7.6 25.75,7.64 J1-T-1.22 25.75,10.35 25.6,10.5 22.02,10.5 21.5,11.02 21.5,18.08 23.6,20.18 23.6,21.08 25.6,23.09 25.6,24.4 25.2,24.8 24.42,24.8 24,25.22 24,28.1 23,29.1 v23,29.6 | v24,30 24.6,30 25.5,30.9 30.8,30.9 32.7,29 34.97,29 35.22,28.95 U5-1.28
  Bottom 0.102: J1-T-1.22 25.75,7.64 v25.7,7.6 | U1-1.21 22.1,30 23,30 | 23,30 v24,30 | v23,29.6 23,30
SCK  (via drill 0.2 pad 0.4)
  Top 0.102: v32.2,13.7 32.2,11.7 31.3,10.8 27.2,10.8 26.75,10.35 J1-T-1.18 26.75,7.64 v26.71,7.6
  Top 0.152: U5-1.24 35.85,23.7 v34.7,23.7
  Bottom 0.102: v32.2,13.7 33.5,13.7 36.1,16.3 36.1,23 35.4,23.7 v34.7,23.7 | J1-T-1.18 26.75,7.64 v26.71,7.6
SCL  (via drill 0.2 pad 0.4)
  Top 0.102: v28.73,7.6 28.75,7.62 J1-T-1.10 28.75,9.75 28.99,9.99 31.64,9.99 34.42,12.78 | U5-1.27 35.7,27.65 | 35.7,27.65 34.65,27.65 v34,28.3 | U6-1.23 34.8,12.4 34.42,12.78 | 34.42,12.78 35.9,14.25 35.9,15.71 38.5,18.31 38.5,26.6 | U7-1.4 38.48,33.98 v38,33.5 | 35.7,27.65 35.75,27.7 38,27.7 38.5,27.2 38.5,26.6 | 38.5,26.6 v39.1,26.6
  Bottom 0.102: J1-T-1.10 28.75,7.62 v28.73,7.6 | R5_5-1.1 v34,28.3 | v39.1,26.6 38.8,26.9 38.8,32.7 v38,33.5
SDA  (via drill 0.2 pad 0.4)
  Top 0.102: v28.23,7.6 28.25,7.62 J1-T-1.12 28.25,9.75 28.69,10.19 31.55,10.19 34.9,13.54 34.9,14.6 | 34.9,14.6 34.9,15 38,18.1 38,26.7 v37.5,27.2 | U6-1.24 v34.5,12 | v35.4,14.6 34.9,14.6 | v34,31 34.55,31.55 U5-1.30 37.75,31.55 arc-90 37.8,31.5 | v37.8,29.6 37.8,31.5 | 37.8,31.5 37.8,32.2 38.92,33.33 U7-1.3
  Bottom 0.102: J1-T-1.12 28.25,7.62 v28.23,7.6 | v37.5,27.2 37.5,29.3 v37.8,29.6 | v34.5,12 34.5,13.7 v35.4,14.6 | v34,31 34,31.66 R5_6-1.1
TXD  (via drill 0.2 pad 0.4)
  Top 0.102: v26.21,7.6 26.21,8.66 J1-T-1.20 26.25,10.35 25.9,10.7 22.1,10.7 21.7,11.1 21.7,18 23.8,20.1 23.8,21 25.9,23.1 25.9,24.4 25.3,25 24.5,25 24.2,25.3 24.2,28.3 23.5,29 23.5,30.7 | 23.5,30.7 23.5,30.6 v24,30.6 | 23.5,30.7 23.5,31 23.7,31.2 31.2,31.2 32.1,30.3 35.85,30.3 U5-1.29
  Bottom 0.102: J1-T-1.20 26.25,7.64 v26.21,7.6 | U1-1.20 22.9,30.5 23,30.6 v24,30.6
VBATT  (via drill 0.2 pad 0.4)
  Top 0.152: J1-T-1.30 23.75,9.65 23.5,9.9 19.6,9.9 v19,10.5
  Top 0.2: J1-T-1.30 23.75,7.66 v23.69,7.6 | U4-1.3 14.77,13.57 C4_1-1.2 v14.88,10.4 15.81,10.4 Q5-1.3
  Bottom 0.102: R5_1-1.1 arc90 17.5,12.7 17.5,10.54
  Bottom 0.152: v19,10.5 18.96,10.54 17.5,10.54 U$7.1
  Bottom 0.2: v23.69,7.6 23.75,7.66 J1-T-1.30 | v14.88,10.4 15.53,10.4 U$7.1
VIN  (via drill 0.2 pad 0.4)
  Top 0.152: C2_1-1.1 16.76,13.3 16.76,12.64 17,12.4 17.7,12.4 17.91,12.19 Q5-1.2
  Top 0.2: Q5-1.2 17.96,11.4 19.1,11.4 19.2,11.5 19.31,11.5 D4-1.C | C2_1-1.1 16.76,14.88 U1.1 16.8,14.88 v16.8,16.1 20.23,16.1 R2_2-1.2
  Bottom 0.102: U3-1.1 17.04,15.86 v16.8,16.1
VPP
  Bottom 0.152: U1-1.16 17,32.95 C1_1-1.1
VREF
  Bottom 0.102: U3-1.3 18.57,16.86 arc-90 C3_2-1.1

## Text on the board
tNames: V0.99.3-ESP32-3 | V0.99.3-ESP32-2
bNames: 5 | Made with love in the | 3 | 4 | 2 | 1 | + | 0
tDocu: ESP32 | U5 | MPU9250 | DF12-36-FEMALE
bDocu: MMBT222 | DF12-36-MALE